# Altium PCB AHD Shield Template.PcbDoc
Units mil, origin at the board's own origin, x right, y up, seen from the top; angles counter-clockwise.
Board outline 4500 x 2100 mil, 2 copper layers (Top Layer, Bottom Layer); 11 components, 5 nets, 73 pads, 0 vias.
Unrouted connection lines stored in the file: 4.
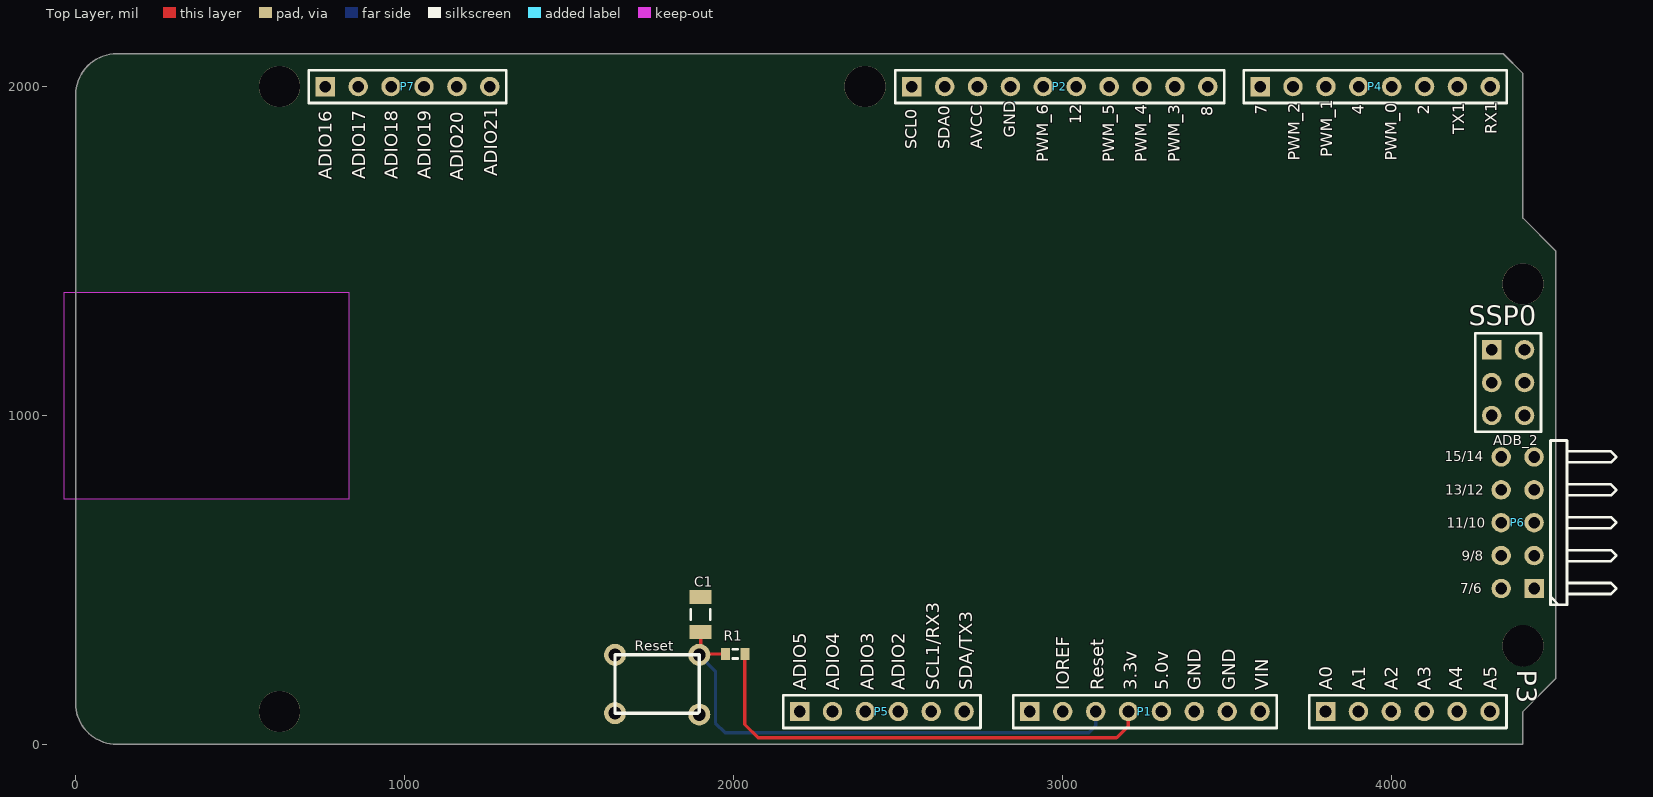
[diagram p0: Top Layer view]
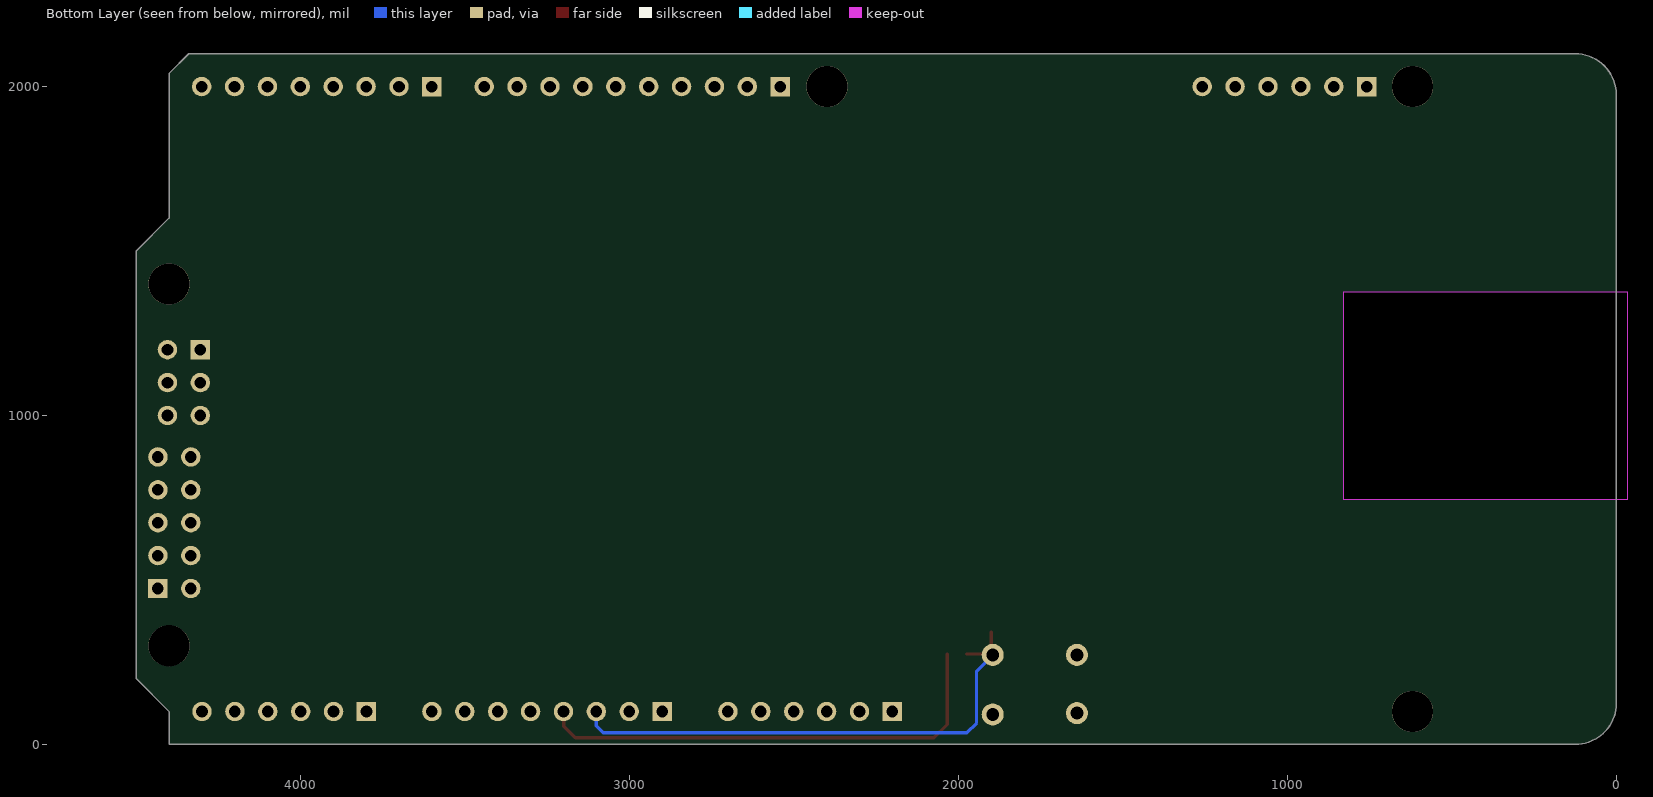
[diagram p1: Bottom Layer view, seen from below]

## Layer stack, top to bottom
Top Layer: signal copper 1.4
Dielectric: dielectric 12.6, FR-4, Dk 4.8
Bottom Layer: signal copper 1.4

## Board outline
125,0 cw(c125,125) 0,125 0,1975 cw(c125,1975) 125,2100 4340,2100 4400,2040 4400,1600 4500,1500 4500,200 4400,100 4400,0
cut-out: -35,1375 830,1375 830,745 -35,745

## Design rules (kind name [scope] priority, off if disabled: settings)
Clearance [All] p1: gap=10
PolygonConnect [All] p1: connectstyle=Relief reliefconductorwidth=10 reliefentries=4 polygonreliefangle="90 Angle"
RoutingVias [All] p1: holewidth=28 width=50 viastyle="Through Hole" minholewidth=28 minwidth=50 maxholewidth=28 maxwidth=50
SilkscreenOverComponentPads [All] p1: minsilkscreentomaskgap=10
SolderMaskExpansion [All] p1: expansion=4
Width [All] p1: maxlimit=10 minlimit=10 preferedwidth=10
27 further rules are at their usual default settings.

## Components (designator, comment, footprint, x,y, rotation, side; value= is the part's Value field where it differs from the comment)
C1 "Cap Semi" C1206 1900,395 r270 top locked
P1 "Arduino Leonardo Power Header" "Arduino Leonardo Power Header" 2901,100 r0 top locked
P2 "Arduino Leonardo AVCC Header" "Arduino Leonardo AVCC Header" 2542,2000 r0 top locked
P3 "Arduino Leonardo Analog Header" "Arduino Leonardo Analog Header" 4300,100 r0 top locked
P4 "Arduino Leonardo RXTX Header" "Arduino Leonardo RXTX PWM Header" 4301,2000 r0 top locked
P5 "AHD Additional IO 1 I2C0 U3 Header" "AHD Additional IO 1 I2C1 U3" 2701,100 r0 top locked
P6 "AHD Additional IO 2" "AHD Additional IO 2 front Digital Header" 4434,474 r0 top locked
P7 "AHD Additoinal IO 3" "AHD Additional IO 3 Header" 1259,2000 r0 top locked
R1 "Res3" J1-0603 2005,275 r0 top locked
Reset "MINI-MTRY-SWTCH" "Momentary Switch" 1640,95 r0 top locked (schematic designator SW1)
SSP0 "SSP0 Header" "SSP0 Header" 4305,1200 r0 top locked

## Footprints (in the part's own frame and the unit in brackets; to place one, negate y for a bottom-side part, rotate by r counter-clockwise, add the part's x,y. Pads: shape width x height; smd on the part's side, far side on the other; paste and mask are expansions set on the pad)
"AHD Additional IO 1 I2C1 U3" [mm] "Connector; Header; 6 Position"
  rect 1.5x1.5 hole 0.9: 1(-12.7,0)
  round 1.5 hole 0.9: 2(-10.16,0) 3(-7.62,0) 4(-5.08,0) 5(-2.54,0) 6(0,0)
  silkscreen extent -13.97,-1.27 1.27,1.27
"AHD Additional IO 2 front Digital Header" [mm] "Connector; Header; 5x2 Position; Right Angle"
  rect 1.5x1.5 hole 0.9: 1(0,0)
  round 1.5 hole 0.9: 2(-2.54,0) 3(0,2.54) 4(-2.54,2.54) 5(0,5.08) 6(-2.54,5.08) 7(0,7.62) 8(-2.54,7.62) 9(0,10.16) 10(-2.54,10.16)
  silkscreen extent 1.27,-1.27 6.35,11.43
"AHD Additional IO 3 Header" [mm] "Connector; Header; 6 Position"
  rect 1.5x1.5 hole 0.9: 1(-12.7,0)
  round 1.5 hole 0.9: 2(-10.16,0) 3(-7.62,0) 4(-5.08,0) 5(-2.54,0) 6(0,0)
  silkscreen extent -13.97,-1.27 1.27,1.27
"Arduino Leonardo Analog Header" [mm] "Connector; Header; 6 Position"
  rect 1.5x1.5 hole 0.9: 1(-12.7,0)
  round 1.5 hole 0.9: 2(-10.16,0) 3(-7.62,0) 4(-5.08,0) 5(-2.54,0) 6(0,0)
  silkscreen extent -13.97,-1.27 1.27,1.27
"Arduino Leonardo AVCC Header" [mm]
  rect 1.5x1.5 hole 0.9: 1(0,0)
  round 1.5 hole 0.9: 2(2.54,0) 3(5.08,0) 4(7.62,0) 5(10.16,0) 6(12.7,0) 7(15.24,0) 8(17.78,0) 9(20.32,0) 10(22.86,0)
  silkscreen extent -1.27,-1.27 24.13,1.27
"Arduino Leonardo Power Header" [mm] "Connector; Header; 8 Position"
  rect 1.5x1.5 hole 0.9: 1(0,0)
  round 1.5 hole 0.9: 2(2.54,0) 3(5.08,0) 4(7.62,0) 5(10.16,0) 6(12.7,0) 7(15.24,0) 8(17.78,0)
  silkscreen extent -1.27,-1.27 19.05,1.27
"Arduino Leonardo RXTX PWM Header" [mm] "Arduino Leonardo Header"
  rect 1.5x1.5 hole 0.9: 1(-17.78,0)
  round 1.5 hole 0.9: 2(-15.24,0) 3(-12.7,0) 4(-10.16,0) 5(-7.62,0) 6(-5.08,0) 7(-2.54,0) 8(0,0)
  silkscreen extent -19.05,-1.27 1.27,1.27
C1206 [mm] "Chip Capacitor, Body 3.2x1.6mm, IPC High Density"
  rect 1.1x1.7 smd: 1(-1.35,0) 2(1.35,0)
  silkscreen extent -0.4,-0.75 0.4,0.75, body extent -1.7,-0.9 1.7,0.9, height 1.3
J1-0603 [mm] "Chip Resistor, Body 1.6x0.8mm, IPC High Density"
  rect 0.7x0.9 smd: 1(-0.75,0) 2(0.75,0)
  silkscreen extent -0.2,-0.35 0.2,0.35, body extent -0.85,-0.48 0.85,0.48, height 0.9
"Momentary Switch" [mm] "Momentary switch for reset"
  round 1.7 hole 1: 1(6.5,-0.1) 2(0,0) 3(6.5,4.5) 4(0,4.5)
  silkscreen extent 0,0 6.5,4.5
"SSP0 Header" [mm] "SSP0 is ARM's SPI variant, fully implements SPI SSI and adds new features"
  rect 1.5x1.5 hole 0.9: 1(0,0)
  round 1.5 hole 0.9: 2(2.54,0) 3(0,-2.54) 4(2.54,-2.54) 5(0,-5.08) 6(2.54,-5.08)
  silkscreen extent -1.27,-6.35 3.81,1.27

## Part data
C1: "Capacitor (Semiconductor SIM Model)"
P2: "Arduino Leonardo AREF Header"
R1: "Resistor"
Reset: library part "Mini Momemtary Switch"

## Free pads (board coordinates)
  round 125 hole 125: ""(620,100) ""(620,2000) ""(2400,2000) ""(4400,300) ""(4400,1400)

## Nets (pads, with @x,y where several pads share a name; then routed paths per layer and width w, separated by ;. In a path a pad name is that pad's centre, name@x,y a point inside that pad or via, vN(x,y) a via of type N, cw(c..) or ccw(c..) an arc to the next point about the centre after c; other vN are vias at no path point)
GND: C1.1 P1.6 P1.7 P2.4 Reset.4
RESET: C1.2 P1.3 R1.1 Reset.3 | length 1596.7
  Top Layer w10: Reset.3 Reset.3@1898.74,275 ; C1.2 1900,276.26 Reset.3@1898.74,275 ; R1.1 Reset.3@1898.74,275
  Bottom Layer w10: Reset.3 1945,223.07 1945,65 1975,35 3080,35 3101,56 P1.3
VCC_3.3V: P1.4 R1.2 | length 1456.4
  Top Layer w10: R1.2 2034.53,60.47 2075,20 3164.53,20 3200,55.47 3200,99 P1.4
VCC_5V: P1.5
VIN: P1.8
pads on no net: P1.1 P1.2 P2.1 P2.2 P2.3 P2.5 P2.6 P2.7 P2.8 P2.9 P2.10 P3.1 P3.2 P3.3 P3.4 P3.5 P3.6 P4.1 P4.2 P4.3 P4.4 P4.5 P4.6 P4.7 P4.8 P5.1 P5.2 P5.3 P5.4 P5.5 P5.6 P6.1 P6.2 P6.3 P6.4 P6.5 P6.6 P6.7 P6.8 P6.9 P6.10 P7.1 P7.2 P7.3 P7.4 P7.5 P7.6 Reset.1 Reset.2 SSP0.1 SSP0.2 SSP0.3 SSP0.4 SSP0.5 SSP0.6

## Silkscreen, mask and mechanical layers (free items; w line width, h text height)
Mechanical 15:
  circle w5: c4400,300 r62.5
  circle w5: c4400,1400 r62.5
  circle w5: c2400,2000 r62.5
  circle w5: c620,100 r62.5
  circle w5: c620,2000 r62.5
  lines w5: 0,125 ccw(c125,125) 125,0 4400,0 4400,100 4500,200 4500,1500 4400,1600 4400,2040 4340,2100 125,2100 ccw(c125,1975) 0,1975 0,125

## Text inside footprints (layer, text, board x,y; h text height)
P1: Top Overlay "IOREF" at 3021,165 h40 r90; Top Overlay "VIN" at 3626,165 h40 r90; Top Overlay "GND" at 3421,165 h40 r90; Top Overlay "GND" at 3526,165 h40 r90; Top Overlay "5.0v" at 3321,165 h40 r90; Top Overlay "3.3v" at 3226,165 h40 r90; Top Overlay "Reset" at 3126,165 h40 r90
P2: Top Overlay "AVCC" at 2757,1810 h35 r90; Top Overlay "12" at 3057,1885 h35 r90; Top Overlay "PWM_3" at 3357,1770 h35 r90; Top Overlay "PWM_4" at 3257,1770 h35 r90; Top Overlay "PWM_5" at 3157,1770 h35 r90; Top Overlay "GND" at 2857,1845 h35 r90; Top Overlay "8" at 3457,1910 h35 r90; Top Overlay "SCL0" at 2557,1810 h35 r90; Top Overlay "SDA0" at 2657,1810 h35 r90; Top Overlay "PWM_6" at 2957,1770 h35 r90
P3: Top Overlay "A5" at 4320,165 h40 r90; Top Overlay "A4" at 4215,165 h40 r90; Top Overlay "A2" at 4020,165 h40 r90; Top Overlay "A3" at 4120,165 h40 r90; Top Overlay "A1" at 3920,165 h40 r90; Top Overlay "A0" at 3820,165 h40 r90
P4: Top Overlay "RX1" at 4321,1855 h35 r90; Top Overlay "TX1" at 4221,1855 h35 r90; Top Overlay "2" at 4116,1915 h35 r90; Top Overlay "PWM_0" at 4016,1775 h35 r90; Top Overlay "4" at 3916,1915 h35 r90; Top Overlay "7" at 3621,1915 h35 r90; Top Overlay "PWM_1" at 3821,1785 h35 r90; Top Overlay "PWM_2" at 3721,1775 h35 r90
P5: Top Overlay "ADIO5" at 2221,165 h40 r90; Top Overlay "ADIO4" at 2321,165 h40 r90; Top Overlay "ADIO3" at 2426,165 h40 r90; Top Overlay "ADIO2" at 2521,165 h40 r90; Top Overlay "SCL1/RX3" at 2626,165 h40 r90; Top Overlay "SDA/TX3" at 2726,165 h40 r90
P6: Top Overlay "ADB_2" at 4310,910 h30; Top Overlay "15/14" at 4162,861 h30; Top Overlay "13/12" at 4164,759 h30; Top Overlay "11/10" at 4169,659 h30; Top Overlay "9/8" at 4214,559 h30; Top Overlay "7/6" at 4209,459 h30
P7: Top Overlay "ADIO21" at 1281,1728 h40 r90; Top Overlay "ADIO20" at 1179,1713 h40 r90; Top Overlay "ADIO19" at 1080,1719 h40 r90; Top Overlay "ADIO18" at 979,1718 h40 r90; Top Overlay "ADIO17" at 881,1718 h40 r90; Top Overlay "ADIO16" at 778,1717 h40 r90